# Altium PCB IR_Sensor.PcbDoc
Units mil, origin at the board's own origin, x right, y up, seen from the top; angles counter-clockwise.
Board outline 2905 x 1155 mil, 2 copper layers (Top Layer, Bottom Layer); 9 components, 7 nets, 28 pads, 0 vias.
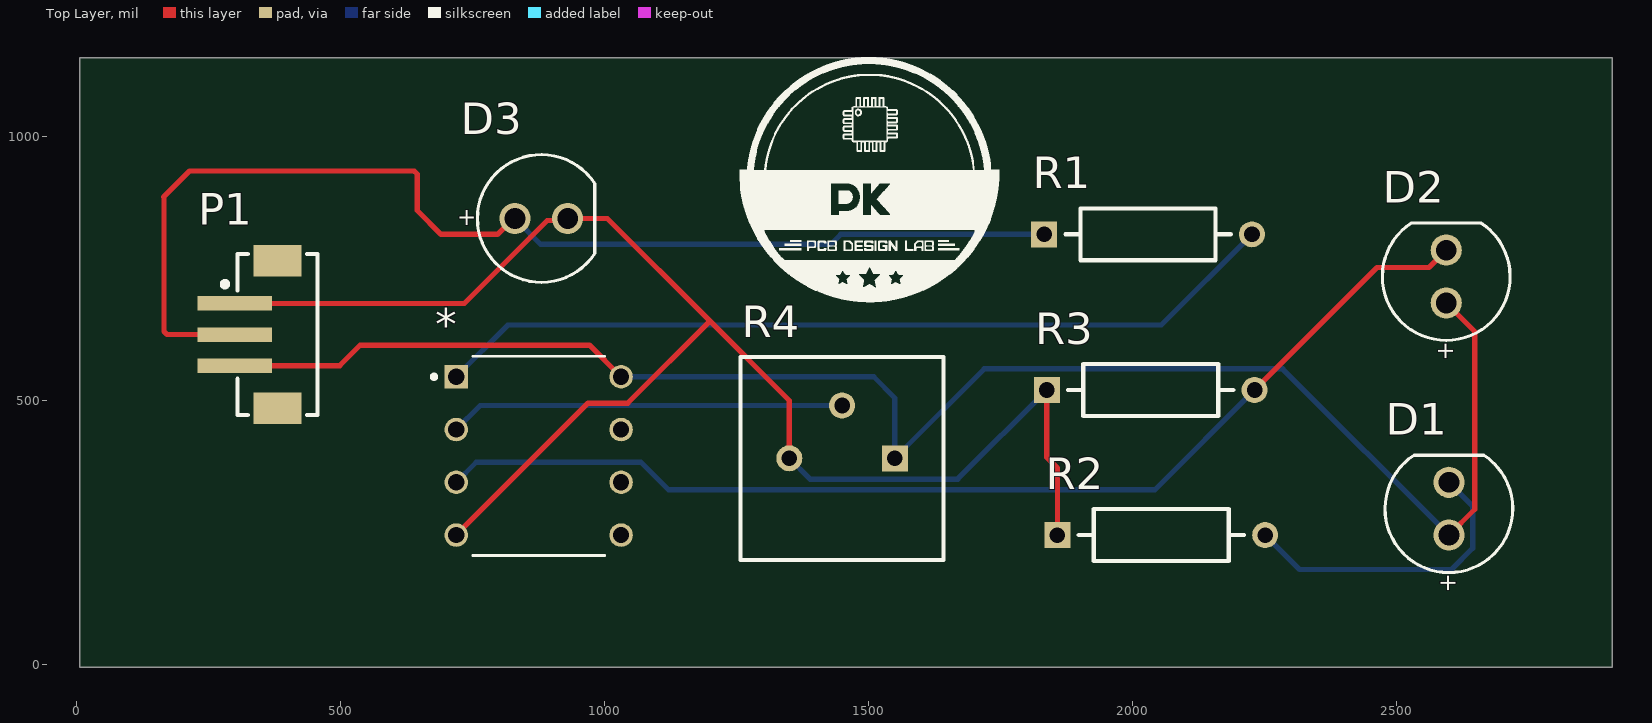
[diagram p0: Top Layer view]
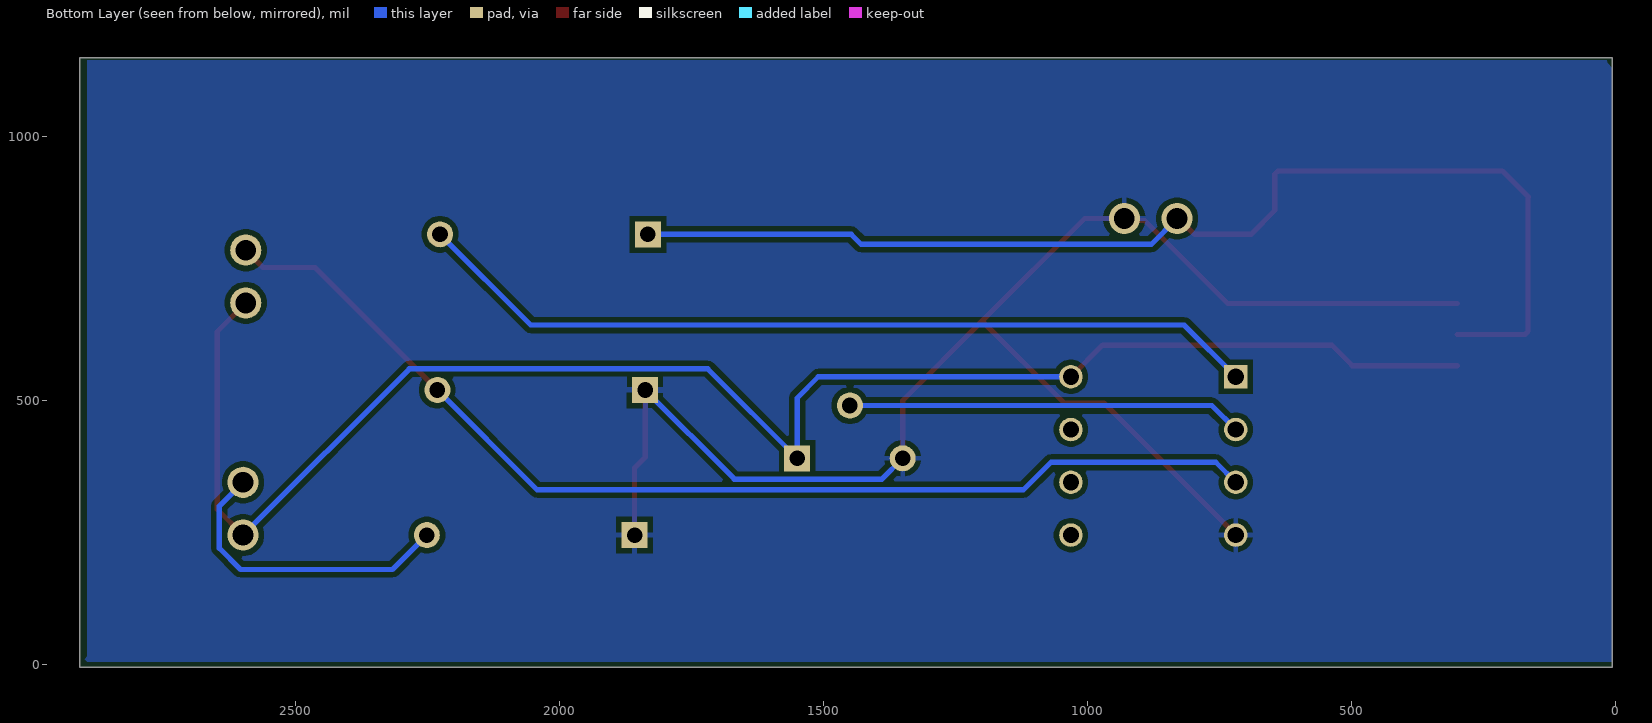
[diagram p1: Bottom Layer view, seen from below]
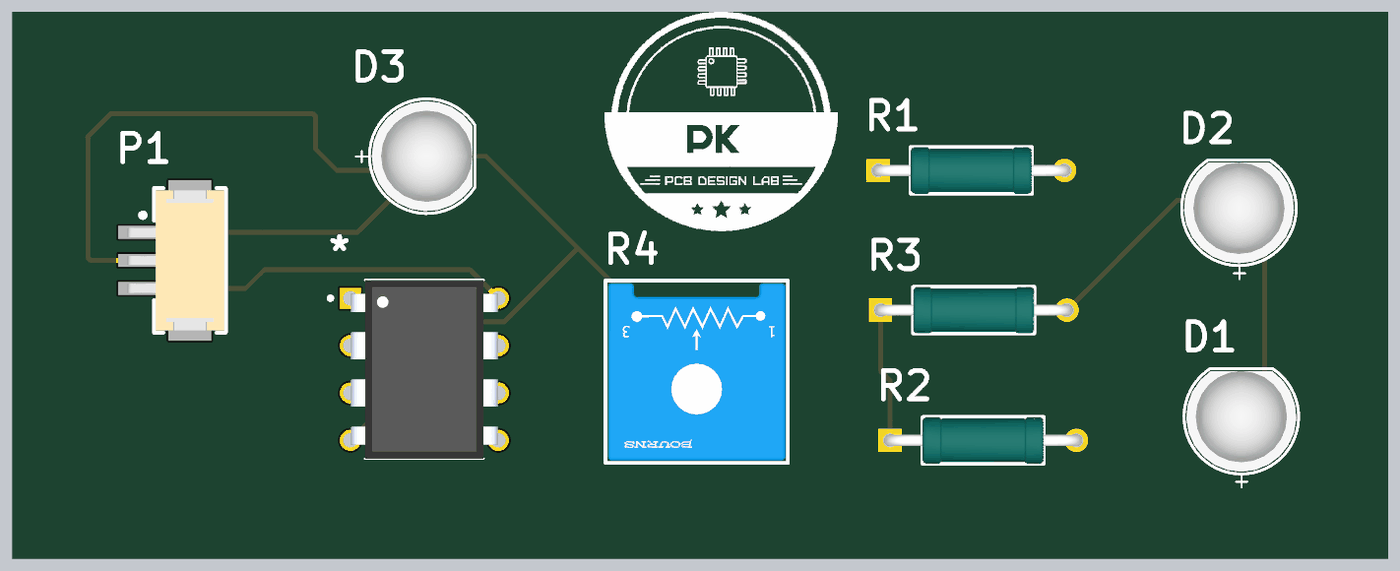
[diagram p2: 3D render of the assembled board from above, using the file's embedded part models]

## Layer stack, top to bottom
Top Solder: solder mask 0.4, Solder Resist, Dk 3.5
Top Layer: signal copper 1.4
Dielectric 1: dielectric 12.6, FR-4, Dk 4.8
Bottom Layer: signal copper 1.4
Bottom Solder: solder mask 0.4, Solder Resist, Dk 3.5

## Board outline
5,-5 2910,-5 2910,1150 5,1150

## Design rules (kind name [scope] priority, off if disabled: settings)
Clearance [All] p1: gap=10 ignorepadtopadclearanceinfootprint=FALSE
PolygonConnect [All] p1: connectstyle=Relief reliefconductorwidth=10 reliefentries=4 polygonreliefangle="90 Angle" airgapwidth=10
RoutingVias [All] p1: holewidth=28 width=50 viastyle="Through Hole" minholewidth=28 minwidth=50 maxholewidth=28 maxwidth=50
SolderMaskExpansion [All] p1: expansion=4 istentingtop=FALSE
Width [All] p1: maxlimit=10 minlimit=10 preferedwidth=10
30 further rules are at their usual default settings.

## Components (designator, comment, footprint, x,y, rotation, side; value= is the part's Value field where it differs from the comment)
* "LM358APE4" DIP794W45P254L959H508Q8 875,395 r0 top
D1 "151051BS04000" WL-TMRC_D5.9H8.7 2600,295 r90 top
D2 "151051BS04000" WL-TMRC_D5.9H8.7 2595,735 r90 top
D3 "151051BS04000" WL-TMRC_D5.9H8.7 880,845 r0 top
P1 "Header" 679303124022 380,625 r90 top
R1 "MRS25000C1002FCT00" FP-MRS25-MFG 2030,815 r0 top
R2 "MRS25000C1002FCT00" FP-MRS25-MFG 2055,245 r0 top
R3 "MRS25000C1002FCT00" FP-MRS25-MFG 2035,520 r0 top
R4 "3386P-1-104LF" FP-3386P-MFG 1450,390 r180 top

## Footprints (in the part's own frame and the unit in brackets; to place one, negate y for a bottom-side part, rotate by r counter-clockwise, add the part's x,y. Pads: shape width x height; smd on the part's side, far side on the other; paste and mask are expansions set on the pad)
679303124022 [mm] "1.50mm SMT Male Vertical Shrouded Header, 3p"
  rect 0.7x3.6 smd: 1(1.5,2.05) 2(0,2.05) 3(-1.5,2.05)
  rect 1.5x2.3 smd: MP1(-3.55,0) MP2(3.55,0)
  silkscreen extent -3.88,-1.93 3.88,2.65, body extent -3.75,-1.85 3.75,3.35, height 5.49
DIP794W45P254L959H508Q8 [mm]
  rect 1.13x1.13 hole 0.78: 1(-3.97,3.81)
  round 1.13 hole 0.78: 2(-3.97,1.27) 3(-3.97,-1.27) 4(-3.97,-3.81) 5(3.97,-3.81) 6(3.97,-1.27) 7(3.97,1.27) 8(3.97,3.81)
  silkscreen extent -5.13,-4.8 3.17,4.8, body extent -3.94,-4.79 3.94,4.79, height 5.08
FP-3386P-MFG [mm]
  rect 1.25x1.25 hole 0.75 paste-2539.97 mask+0: 1(-2.54,-0.015)
  round 1.25 hole 0.75 paste-2539.97 mask+0: 2(0,-2.555) 3(2.54,-0.015)
  silkscreen extent -4.89,-4.89 4.89,4.89, body extent -4.99,-4.99 4.99,4.99, height 0.25
FP-MRS25-MFG [mm]
  rect 1.25x1.25 hole 0.75 paste-2539.97 mask+0: 1(-5,0)
  round 1.25 hole 0.75 paste-2539.97 mask+0: 2(5,0)
  silkscreen extent -3.97,-1.25 3.97,1.25, body extent -5.72,-1.35 5.72,1.35, height 0.25
WL-TMRC_D5.9H8.7 [mm] "THT Mono-color Round Color LED, 2-leads"
  round 1.5 hole 1: 1(-1.27,0) 2(1.27,0)
  silkscreen extent -3.07,-3.07 2.58,3.08, body extent -2.95,-2.95 2.45,2.95, height 9.2

## Part data
*: "Operational Amplifier, 2 Func, 5000uV Offset-Max, BIPolar, PDIP8", Average Bias Current-Max (IIB)=-200nA, Bias Current-Max (IIB) @25C=100nA, Case/Package=DIP, Frequency Compensation=YES, Input Offset Voltage-Max=5mV, Manufacturer="Texas Instruments", Max Operating Temperature=70°C, Max Supply Current=2mA, Min Operating Temperature=0°C, Nominal Supply Voltage=5V, Package Body Material=Plastic, Package Equivalence Code=DIP8,.3, Package Shape=Rectangular, Package Style=IN-LINEMeter, Peak Reflow Temperature (Cel)=260°C, Power Supplies=+-1.5/+-15/3/30V, Supply Voltage Limit-Max=32V, Temperature Grade=COMMERCIAL, Voltage Gain-Min=15000, Amplifier Type="OPERATIONAL AMPLIFIER", Architecture=VOLTAGE-FEEDBACK, Category="Amplifiers - Op Amps, Buffer, Instrumentation", Channels=2, Common-mode Reject Ratio-Nom=80dB, ComponentLink1Description=https://www.ti.com:443/lit/ds/symlink/lm158.pdf?src-supplier=IHS+Markit, ComponentLink1URL=https://www.ti.com:443/lit/ds/symlink/lm158.pdf?src-supplier=IHS+Markit, ComponentLink2Description=https://datasheet.ciiva.com/1811/lm358-1811016.pdf?src-supplier=Digikey, ComponentLink2URL=https://datasheet.ciiva.com/1811/lm358-1811016.pdf?src-supplier=Digikey, Height - Seated (Max)=5.08mm, JESD-30 Code=R-PDIP-T8, JESD-609 Code=e3, Length=9.59mm, Low-Offset=No, Manufacturer Part Number=LM358APE4, Moisture Sensitivity Level=1, Packaging=Rail/Tube, Pins=8, Pricing="1000=0.1345, 2000=0.1331, 3000=0.1318, 4000=0.1305, 5000=0.1292, 6000=0.1279, 10000=0.1266, 20000=0.1253, 50000=0.1241 (USD)", Qualification Status="Not Qualified", Reach SVHC Compliant=Yes, RoHS=Yes, RoHS Compliant=Yes, Slew Rate=0.3V/µs, Supplier="Arrow Electronics", Supplier Part Number=LM358APE4, Surface Mount=No, Technology=BIPOLAR, Terminal Finish=Tin, Terminal Form="Through Hole", Terminal Pitch=2.54mm, Terminal Position=DUAL, Unity Gain BW-Nom=700kHz, Width=7.62mm
D1 D2 D3: library part CMP-1488-00009-2, Case/Package=Radial, Color=Blue, Forward Current=100mA, Forward Voltage=3.2V, Max Operating Temperature=85°C, Max Reverse Voltage (DC)=5V, Min Operating Temperature=-40°C, Test Current=20mA, Dominant Wavelength=470nm, Height=8.6mm, Length=5mm, Lens Size=5mm, Lens Style="Circular, Diffused, Round", Luminous Intensity=500mcd, Mount="Through Hole", NexarPartId=29717812, Packaging=Bulk, Peak Wavelength=465nm, REACH SVHC=Unknown, RoHS=Compliant, Viewing Angle=40°, Wavelength=470nm, Width=5mm
P1: library part CMP-1502-00722-2, Color="Beige, White", Contact Resistance=20mΩ, Current Rating=1A, Flammability Rating="UL94 V-0", Insulation Resistance=100MΩ, Max Operating Temperature=85°C, Min Operating Temperature=-25°C, Operating Supply Voltage=50V, Connector Type="Male Pin", Contact Gender=Male, Contact Material=Copper, Contact Plating=Tin, Gender=Male, Height=5mm, Housing Material=Nylon, Insulation=Insulated, Lead Pitch=1.5mm, Length=7.5mm, Mount="Surface Mount", NexarPartId=18818282, Number of Contacts=3, Number of Pins=3, Number of Positions=3, Number of Rows=1, Orientation=Vertical, Packaging="Tape and Reel", Pitch=1.5mm, REACH SVHC="No SVHC", RoHS=Compliant, Termination=SMD/SMT, Voltage Rating=50V, Width=7.5mm
R1 R2 R3: library part CMP-00030-42632392-1, "MRS25000C1002FCT00 Resistor, 10 kOhm, ± 1%, 600 mW, Axial Leaded, Metal Film (Thin Film), Professional", Case/Package=Conformal, Max Operating Temperature=155°C, Max Power Dissipation=600mW, Min Operating Temperature=-55°C, Resistance=10kΩ, Temperature Coefficient=50ppm/°C, Tolerance=1%, Voltage Rating=350V, Composition="Metal Film, Thin Film", Contact Plating=Tin, Diameter=2.5mm, Lead Free="Lead Free", Lead Length=26mm, Length=6.5mm, Military Standard=Not, Mount="Through Hole", NexarPartId=42632392, Number of Pins=2, Number of Terminations=2, Power Rating=600mW, Radiation Hardening=No, REACH SVHC=Unknown, RoHS=Compliant, Schedule B="8533210090, 8533210090", Termination=Axial, Voltage Rating (DC)=350V, Width=2.5mm
R4: library part CMP-2000-05592-8, "TRIMMER 100K OHM 0.5W PC PIN TOP", Color=Blue, Manufacturer Series=3386, Max Operating Temperature=125°C, Max Power Dissipation=500mW, Min Operating Temperature=-55°C, Package Quantity=100, Resistance=100kR, Resistance Law=Linear, Resistance Tolerance=10%, Resistor Type=Cermet, Temperature Coefficient=100ppm/°C, Voltage Rating=300V, Actuator Orientation=Vertical, Actuator Type=SCREW, Contact Plating=Tin, Depth=9.53mm, Height=4.83mm, Lead Free="Contains Lead", Length=9.53mm, Military Standard=Not, Mount="Through Hole", Number of Pins=3, Number of Terminals/Pins=3, Number of Turns=1, Packaging=Rail/Tube, Power Rating=500mW, Radiation Hardening=No, Reach SVHC Compliant=Yes, RoHS Compliant=Yes, Series="Trimpot® 3386 - Sealed", Taper=Linear, Technology=CERMET, Terminal Finish=Tin, Termination=Pin, Tolerance=10%, Type=Potentiometer, Weight=0.03oz, Width=9.53mm

## Nets (pads, with @x,y where several pads share a name; then routed paths per layer and width w, separated by ;. In a path a pad name is that pad's centre, name@x,y a point inside that pad or via, vN(x,y) a via of type N, cw(c..) or ccw(c..) an arc to the next point about the centre after c; other vN are vias at no path point)
+5: *.8 D1.1 D2.1 P1.3 R4.1 | length 3156
  Top Layer w10: P1.3 497.94,565.94 537,605 971.3,605 *.8 ; D2.1 2649,631 2649,294.01 D1.1
  Bottom Layer w10: *.8 1510,545 1550,505 R4.1 1719.41,560 2285,560 D1.1
GND: *.4 D3.2 P1.1 R2.1 R3.1 R4.3 | length 2876.3
  Top Layer w10: P1.1 734.06,684.06 891.34,841.34 926.34,841.34 D3.2 1004.99,845.01 1199.5,650.5 ; *.4 968.7,495 1044,495 1199.5,650.5 ; R4.3 1350,500 1199.5,650.5 ; R3.1 1838.15,392 1858.15,372 R2.1
  Bottom Layer w10: R4.3 1389.61,350.98 1669.13,350.98 R3.1
Net*_1: *.1 R1.2 | length 1620
  Bottom Layer w10: *.1 816.7,643 2054.85,643 R1.2
Net*_2: *.2 R4.2 | length 750.2
  Bottom Layer w10: *.2 764.29,490.59 R4.2
Net*_3: *.3 D2.2 R3.2 | length 2101.6
  Top Layer w10: R3.2 2463.85,752 2561.99,752 D2.2
  Bottom Layer w10: *.3 756.7,383 1069,383 1121.02,330.98 2042.83,330.98 R3.2
NetD1_2: D1.2 R2.2 | length 580.3
  Bottom Layer w10: R2.2 2316.85,180 2605,180 2645,220 2645,300 D1.2
OUT: D3.1 P1.2 R1.1 | length 2212.2
  Top Layer w10: P1.2 170.86,625 165,630.86 165,885 164.14,885.86 213.28,935 639.14,935 645,929.14 645,860 690,815 797.04,815 827.05,845.01 D3.1
  Bottom Layer w10: D3.1 879.01,796 1428.57,796 1447.57,815 R1.1
pads on no net: *.5 *.6 *.7 P1.MP1 P1.MP2

## Polygon pours and split planes (outlines as drawn)
GND on Bottom Layer "GND_L02_P000" (solid, remove dead copper, pour order 0): 5,1145 2895,1145 2895,15 2900,10 2895,5 5,5 5,1130 15,1140
no net on Board Shape "NONET_L-01_P-001" (solid, remove dead copper): 15,1145 25,1135 2880,1135 2880,40 2865,25 25,25 25,1125

## Silkscreen, mask and mechanical layers (free items; w line width, h text height)
Top Overlay:
  drawing of 22 lines, arcs and shapes, not listed

## Text inside footprints (layer, text, board x,y; h text height)
D1: Top Overlay "+" at 2612.99,135.55 h31.5 r90
D2: Top Overlay "+" at 2607.99,575.55 h31.5 r90
D3: Top Overlay "+" at 720.55,832.01 h31.5